# EAGLE board SparkFun RTK Facet - Display SD SIM-Panel (EAGLE 9.6.2), part 1 of 3
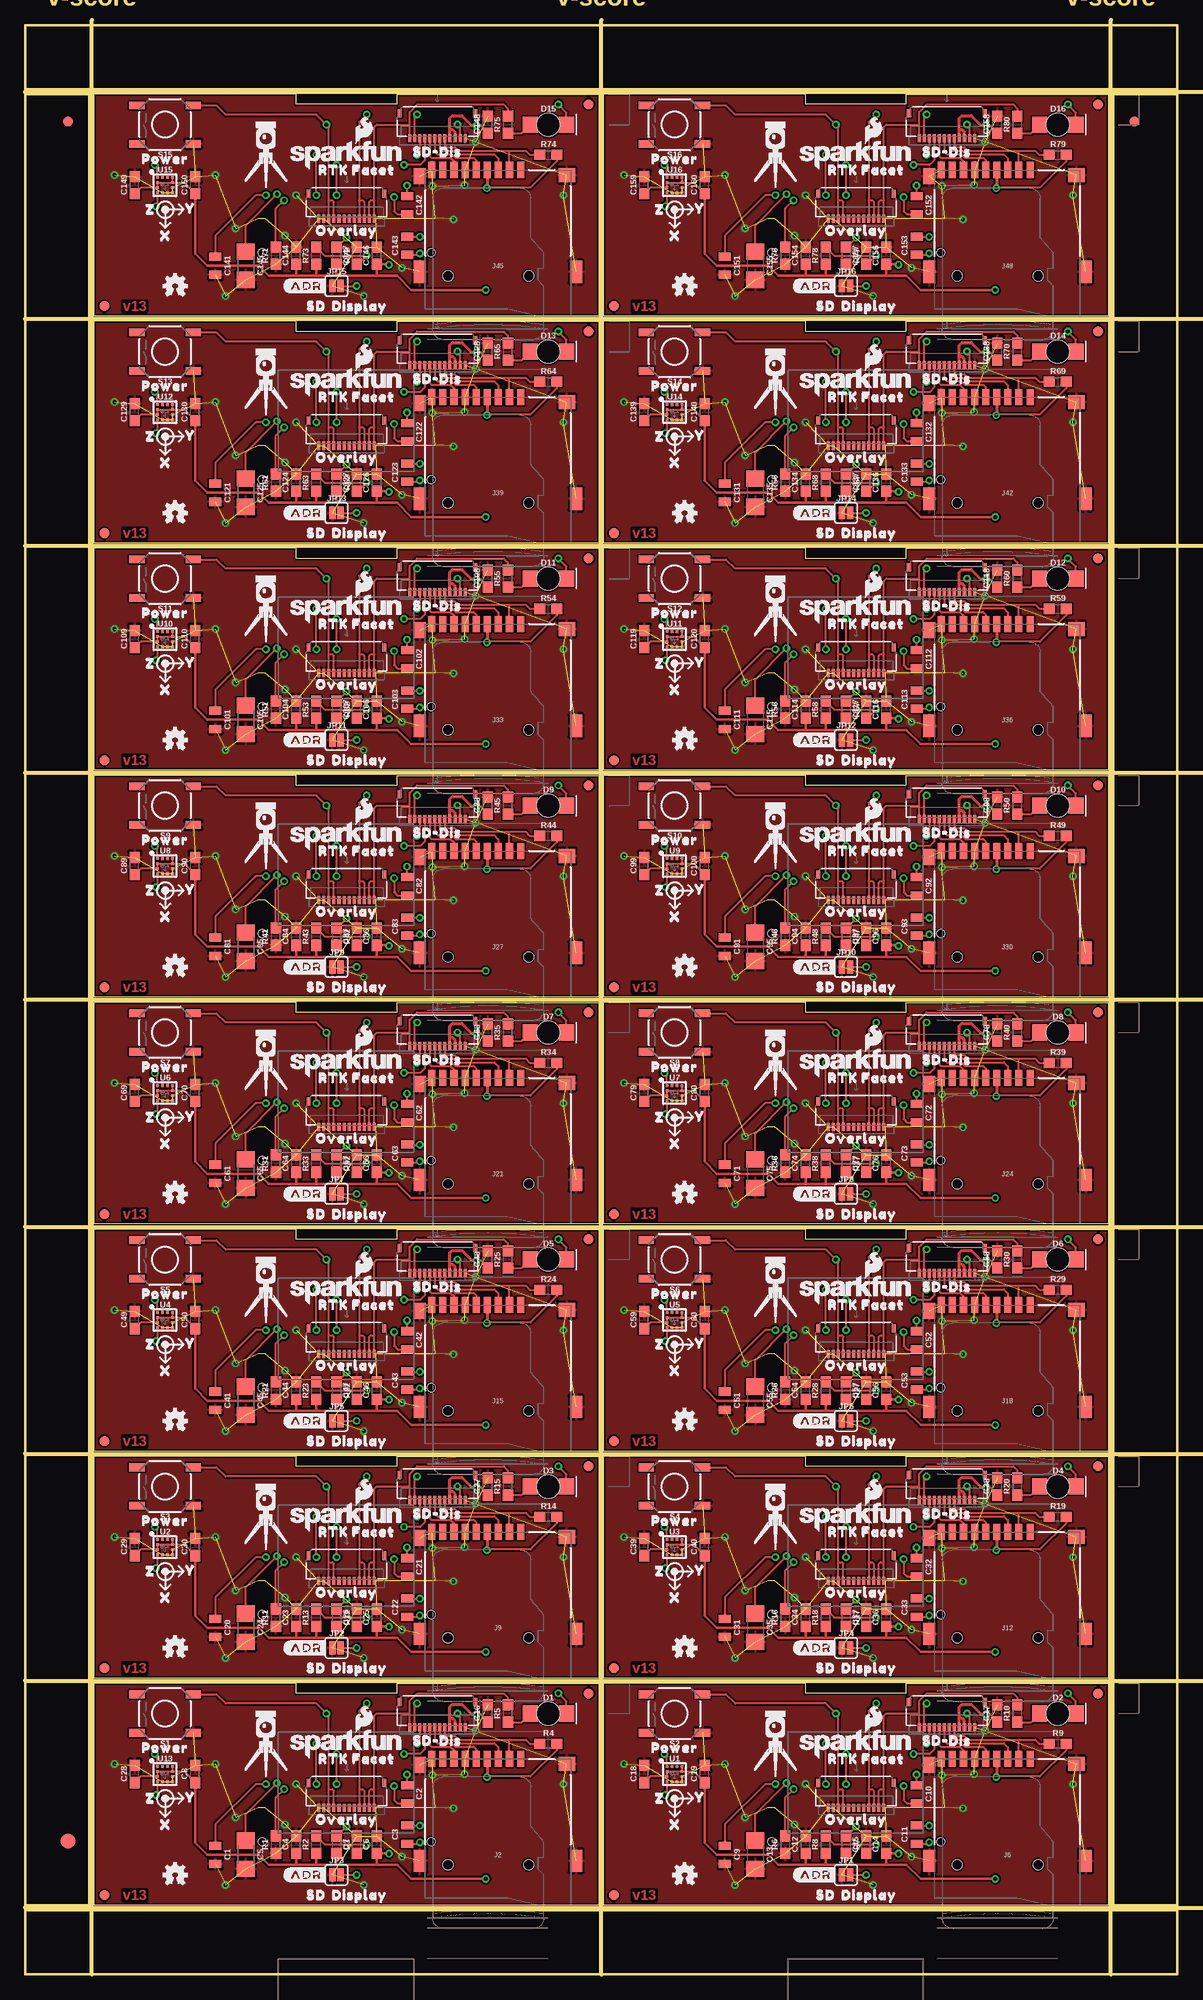
[diagram p0: board, top side]
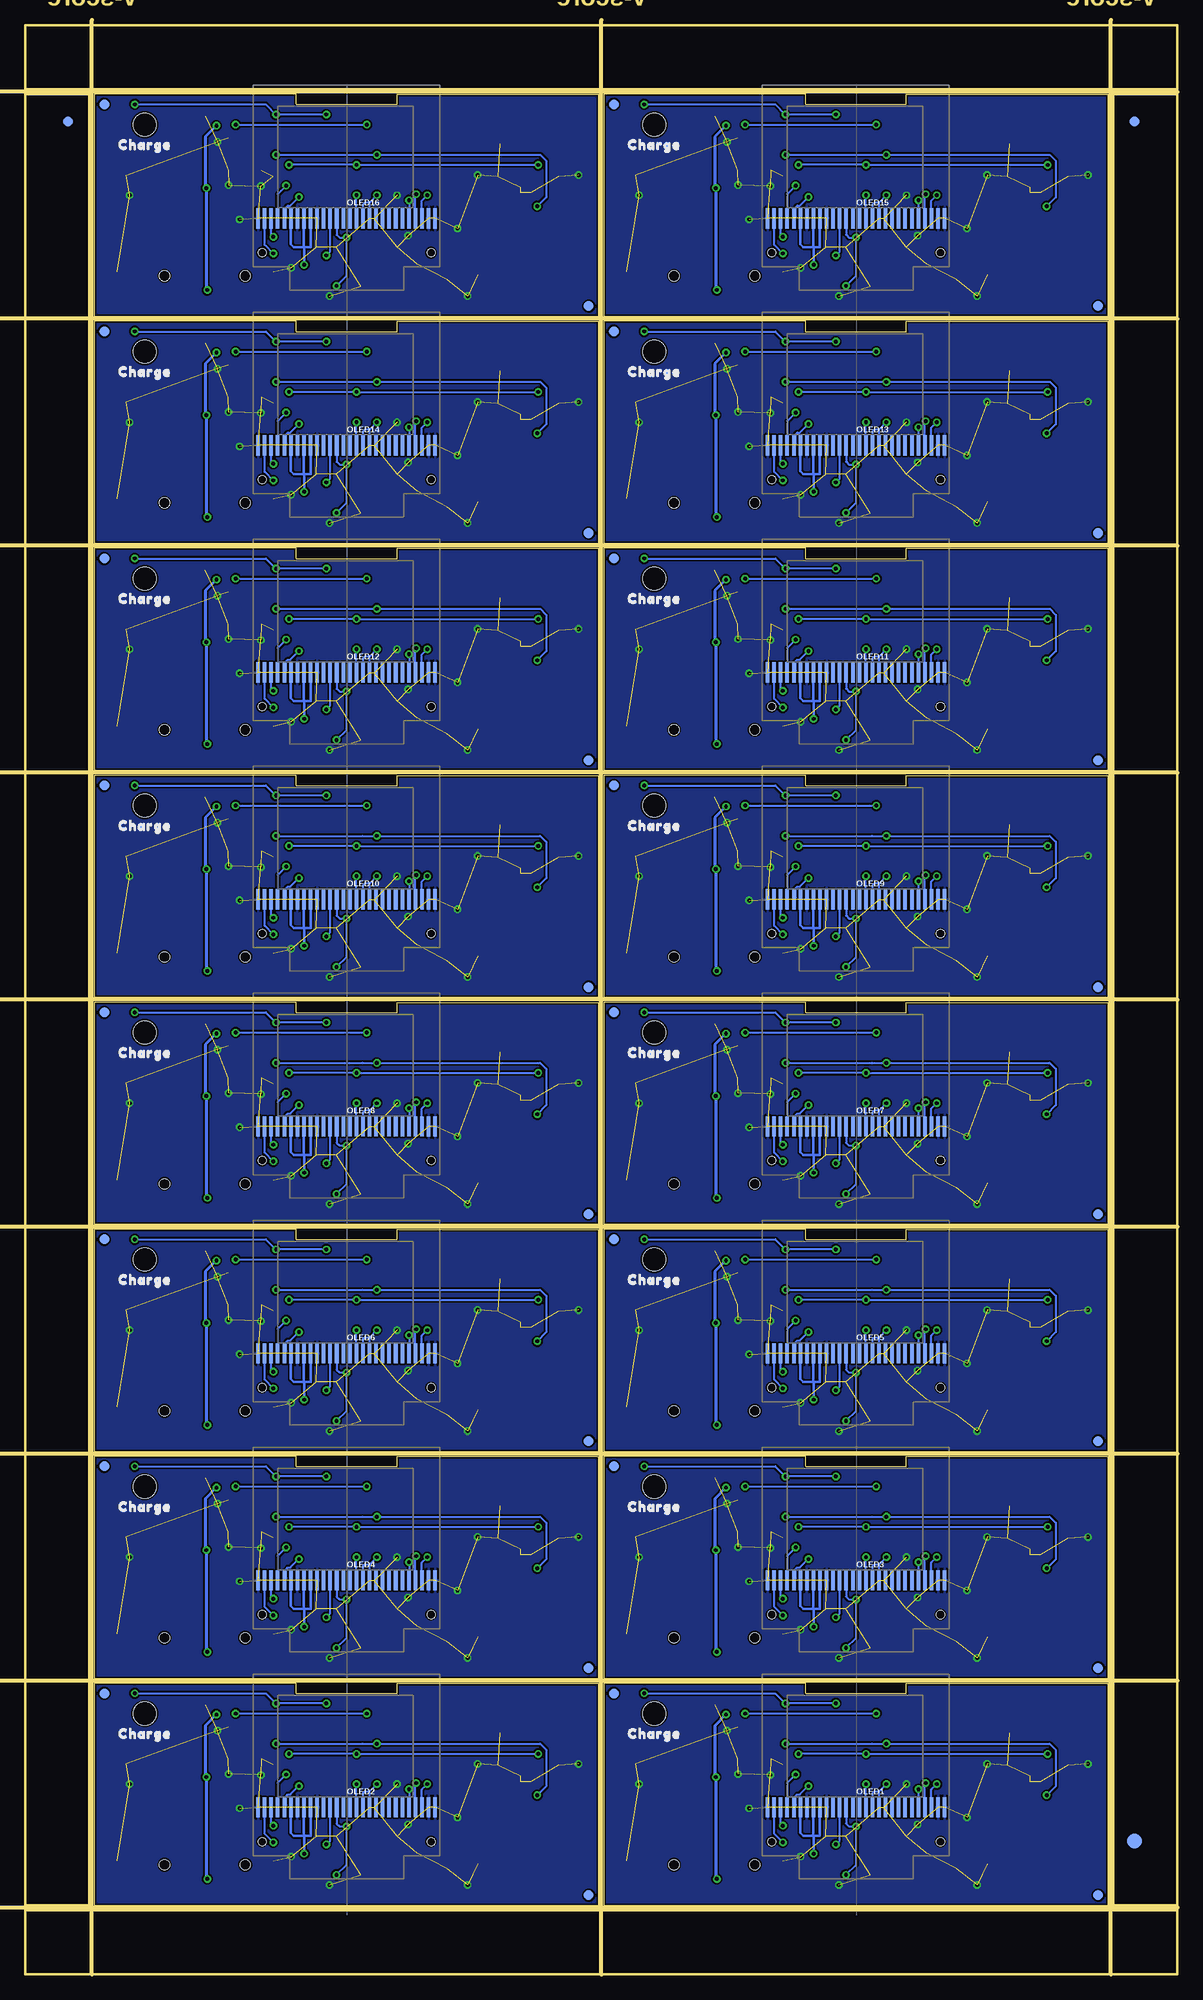
[diagram p1: board, bottom side, seen from below]

Size 114.22 x 193.27 mm. Coordinates in mm from the lower left corner, seen from the top.
Outline: 144 segments
Copper layers (1*16): Top 0.035mm / dielectric 1.5mm / Bottom 0.035mm
Design rules "SparkFun RTK Facet - Display SD SIM": minimum track width 7mil, minimum drill 15mil, track to track 7mil, track to pad 7mil, pad to pad 7mil, via to via 7mil, smd to smd 7mil, copper to edge 7mil, drill to drill 7mil, minimum pad ring 7mil, minimum via ring 7mil, stop-mask expansion 4mil, vias tented up to drill 25mil, thermal gap 10mil
Net classes: 0 default: width 0.127 mm; 1 power: width 0.178 mm
tKeepout: area 54.9,6.9 to 56.9,28.9; area 6.9,6.9 to 8.9,28.9; area 105.4,6.9 to 107.4,28.9; area 57.4,6.9 to 59.4,28.9; area 54.9,29.4 to 56.9,51.4; area 6.9,29.4 to 8.9,51.4; area 105.4,29.4 to 107.4,51.4; area 57.4,29.4 to 59.4,51.4; area 54.9,51.9 to 56.9,73.9; area 6.9,51.9 to 8.9,73.9; area 105.4,51.9 to 107.4,73.9; area 57.4,51.9 to 59.4,73.9; 20 more areas
bKeepout: area 54.9,6.9 to 56.9,28.9; area 6.9,6.9 to 8.9,28.9; area 105.4,6.9 to 107.4,28.9; area 57.4,6.9 to 59.4,28.9; area 54.9,29.4 to 56.9,51.4; area 6.9,29.4 to 8.9,51.4; area 105.4,29.4 to 107.4,51.4; area 57.4,29.4 to 59.4,51.4; area 54.9,51.9 to 56.9,73.9; area 6.9,51.9 to 8.9,73.9; area 105.4,51.9 to 107.4,73.9; area 57.4,51.9 to 59.4,73.9; 20 more areas
tRestrict: area 29.3,16.4 to 29.5,16.7; area 79.8,16.4 to 80,16.7; area 29.3,38.9 to 29.5,39.2; area 79.8,38.9 to 80,39.2; area 29.3,61.4 to 29.5,61.7; area 79.8,61.4 to 80,61.7; area 29.3,83.9 to 29.5,84.2; area 79.8,83.9 to 80,84.2; area 29.3,106.4 to 29.5,106.7; area 79.8,106.4 to 80,106.7; area 29.3,128.9 to 29.5,129.2; area 79.8,128.9 to 80,129.2; 4 more areas
Milling: 12 lines

## Footprints (pad centres in the part's own frame; a part is rotated, then mirrored left to right if it is on the bottom)
0805 = smd 0.8 x 1.2: 1 -0.9,0; 2 0.9,0
0603 = smd 1.1 x 1: 1 -0.85,0; 2 0.85,0
1206 = smd 1.6 x 1.8: 1 -1.4,0; 2 1.4,0
LED-1206-BOTTOM = smd 1.5 x 1.6: A -1.8,0; C 1.8,0 | hole 2.3: 0,0
FIDUCIAL-1X2 = smd 1 x 1: 1 0,0
FIDUCIAL-1.5X3 = smd 1.5 x 1.5: 1 0,0
FPC_12_DOUBLESIDED_BACKFLIP = smd 0.3 x 0.8: 1 -2.75,1.35; 2 -2.25,1.35; 3 -1.75,1.35; 4 -1.25,1.35; 5 -0.75,1.35; 6 -0.25,1.35; 7 0.25,1.35; 8 0.75,1.35; 9 1.25,1.35; 10 1.75,1.35; 11 2.25,1.35; 12 2.75,1.35 | smd 0.4 x 0.8: MP1 -3.75,-1.15; MP2 3.75,-1.15
MICROSD-EXTERNALPIN = smd 0.7 x 1.6: 1 2.25,10.5; 2 1.15,10.5; 3 0.05,10.5; 4 -1.05,10.5; 5 -2.15,10.5; 6 -3.25,10.5; 7 -4.35,10.5; 8 -5.45,10.5; 9 -6.55,10.5 | smd 1.2 x 1.6: 10 -7.75,9.9 | smd 1.2 x 2.2: 11 -7.75,0.4; 12 7.75,0.4 | smd 1.6 x 1.4: 13 6.85,10 | hole 1: 3.05,0; -4.95,0
SMT-JUMPER_2_NO_SILK = smd 0.635 x 1.27: 1 -0.406,0; 2 0.406,0
OLED-0.66-64X48 = smd 0.35 x 2: 1 -8.775,0; 2 -8.125,0; 3 -7.475,0; 4 -6.825,0; 5 -6.175,0; 6 -5.525,0; 7 -4.875,0; 8 -4.225,0; 9 -3.575,0; 10 -2.925,0; 11 -2.275,0; 12 -1.625,0; 13 -0.975,0; 14 -0.325,0; 15 0.325,0; 16 0.975,0; 17 1.625,0; 18 2.275,0; 19 2.925,0; 20 3.575,0; 21 4.225,0; 22 4.875,0; 23 5.525,0; 24 6.175,0; 25 6.825,0; 26 7.475,0; 27 8.125,0; 28 8.775,0 | hole 0.8: 8.375,-3.4; -8.375,-3.4
TACTILE_SWITCH_SMD_5.2MM = smd 1.524 x 0.762: 1 -2.794,1.905; 2 2.794,1.905; 3 -2.794,-1.905; 4 2.794,-1.905
LGA-12-LISDH12 = smd 0.275 x 0.25: 1 -0.75,0.75; 2 -0.75,0.25; 3 -0.75,-0.25; 4 -0.75,-0.75; 7 0.75,-0.75; 8 0.75,-0.25; 9 0.75,0.25; 10 0.75,0.75 | smd 0.25 x 0.275: 5 -0.25,-0.75; 6 0.25,-0.75; 11 0.25,0.75; 12 -0.25,0.75

## Placement (x,y rotation side)
C1  2.2uF  [0805]  18.86,11.86 270 top
C2  1.0uF  [0805]  37.86,17.86 270 top
C3  1.0uF  [0805]  37.86,13.86 90 top
C4  1.0uF  [0603]  26.86,12.86 90 top
C5  4.7uF  [1206]  21.86,11.86 270 top
C6  1.0uF  [0603]  34.86,12.86 90 top
C7  1.0uF  [0603]  32.86,12.86 90 top
C8  10uF  [0603]  16.86,19.86 90 top
C9  2.2uF  [0805]  69.37,11.86 270 top
C10  1.0uF  [0805]  88.37,17.86 270 top
C11  1.0uF  [0805]  88.37,13.86 90 top
C12  1.0uF  [0603]  77.37,12.86 90 top
C13  4.7uF  [1206]  72.37,11.86 270 top
C14  1.0uF  [0603]  85.37,12.86 90 top
C15  1.0uF  [0603]  83.37,12.86 90 top
C16  0.1uF  [0603]  45.86,25.86 90 top
C17  0.1uF  [0603]  96.37,25.86 90 top
C18  0.1uF  [0603]  61.37,19.86 90 top
C19  10uF  [0603]  67.37,19.86 90 top
C20  2.2uF  [0805]  18.86,34.36 270 top
C21  1.0uF  [0805]  37.86,40.36 270 top
C22  1.0uF  [0805]  37.86,36.36 90 top
C23  1.0uF  [0603]  26.86,35.36 90 top
C24  4.7uF  [1206]  21.86,34.36 270 top
C25  1.0uF  [0603]  34.86,35.36 90 top
C26  1.0uF  [0603]  32.86,35.36 90 top
C27  0.1uF  [0603]  45.86,48.36 90 top
C28  0.1uF  [0603]  10.86,19.86 90 top
C29  0.1uF  [0603]  10.86,42.36 90 top
C30  10uF  [0603]  16.86,42.36 90 top
C31  2.2uF  [0805]  69.37,34.36 270 top
C32  1.0uF  [0805]  88.37,40.36 270 top
C33  1.0uF  [0805]  88.37,36.36 90 top
C34  1.0uF  [0603]  77.37,35.36 90 top
C35  4.7uF  [1206]  72.37,34.36 270 top
C36  1.0uF  [0603]  85.37,35.36 90 top
C37  1.0uF  [0603]  83.37,35.36 90 top
C38  0.1uF  [0603]  96.37,48.36 90 top
C39  0.1uF  [0603]  61.37,42.36 90 top
C40  10uF  [0603]  67.37,42.36 90 top
C41  2.2uF  [0805]  18.86,56.87 270 top
C42  1.0uF  [0805]  37.86,62.87 270 top
C43  1.0uF  [0805]  37.86,58.87 90 top
C44  1.0uF  [0603]  26.86,57.87 90 top
C45  4.7uF  [1206]  21.86,56.87 270 top
C46  1.0uF  [0603]  34.86,57.87 90 top
C47  1.0uF  [0603]  32.86,57.87 90 top
C48  0.1uF  [0603]  45.86,70.87 90 top
C49  0.1uF  [0603]  10.86,64.87 90 top
C50  10uF  [0603]  16.86,64.87 90 top
C51  2.2uF  [0805]  69.37,56.87 270 top
C52  1.0uF  [0805]  88.37,62.87 270 top
C53  1.0uF  [0805]  88.37,58.87 90 top
C54  1.0uF  [0603]  77.37,57.87 90 top
C55  4.7uF  [1206]  72.37,56.87 270 top
C56  1.0uF  [0603]  85.37,57.87 90 top
C57  1.0uF  [0603]  83.37,57.87 90 top
C58  0.1uF  [0603]  96.37,70.87 90 top
C59  0.1uF  [0603]  61.37,64.87 90 top
C60  10uF  [0603]  67.37,64.87 90 top
C61  2.2uF  [0805]  18.86,79.38 270 top
C62  1.0uF  [0805]  37.86,85.38 270 top
C63  1.0uF  [0805]  37.86,81.38 90 top
C64  1.0uF  [0603]  26.86,80.38 90 top
C65  4.7uF  [1206]  21.86,79.38 270 top
C66  1.0uF  [0603]  34.86,80.38 90 top
C67  1.0uF  [0603]  32.86,80.38 90 top
C68  0.1uF  [0603]  45.86,93.38 90 top
C69  0.1uF  [0603]  10.86,87.38 90 top
C70  10uF  [0603]  16.86,87.38 90 top
C71  2.2uF  [0805]  69.37,79.38 270 top
C72  1.0uF  [0805]  88.37,85.38 270 top
C73  1.0uF  [0805]  88.37,81.38 90 top
C74  1.0uF  [0603]  77.37,80.38 90 top
C75  4.7uF  [1206]  72.37,79.38 270 top
C76  1.0uF  [0603]  85.37,80.38 90 top
C77  1.0uF  [0603]  83.37,80.38 90 top
C78  0.1uF  [0603]  96.37,93.38 90 top
C79  0.1uF  [0603]  61.37,87.38 90 top
C80  10uF  [0603]  67.37,87.38 90 top
C81  2.2uF  [0805]  18.86,101.89 270 top
C82  1.0uF  [0805]  37.86,107.89 270 top
C83  1.0uF  [0805]  37.86,103.89 90 top
C84  1.0uF  [0603]  26.86,102.89 90 top
C85  4.7uF  [1206]  21.86,101.89 270 top
C86  1.0uF  [0603]  34.86,102.89 90 top
C87  1.0uF  [0603]  32.86,102.89 90 top
C88  0.1uF  [0603]  45.86,115.89 90 top
C89  0.1uF  [0603]  10.86,109.89 90 top
C90  10uF  [0603]  16.86,109.89 90 top
C91  2.2uF  [0805]  69.37,101.89 270 top
C92  1.0uF  [0805]  88.37,107.89 270 top
C93  1.0uF  [0805]  88.37,103.89 90 top
C94  1.0uF  [0603]  77.37,102.89 90 top
C95  4.7uF  [1206]  72.37,101.89 270 top
C96  1.0uF  [0603]  85.37,102.89 90 top
C97  1.0uF  [0603]  83.37,102.89 90 top
C98  0.1uF  [0603]  96.37,115.89 90 top
C99  0.1uF  [0603]  61.37,109.89 90 top
C100  10uF  [0603]  67.37,109.89 90 top
C101  2.2uF  [0805]  18.86,124.4 270 top
C102  1.0uF  [0805]  37.86,130.4 270 top
C103  1.0uF  [0805]  37.86,126.4 90 top
C104  1.0uF  [0603]  26.86,125.4 90 top
C105  4.7uF  [1206]  21.86,124.4 270 top
C106  1.0uF  [0603]  34.86,125.4 90 top
C107  1.0uF  [0603]  32.86,125.4 90 top
C108  0.1uF  [0603]  45.86,138.4 90 top
C109  0.1uF  [0603]  10.86,132.4 90 top
C110  10uF  [0603]  16.86,132.4 90 top
C111  2.2uF  [0805]  69.37,124.4 270 top
C112  1.0uF  [0805]  88.37,130.4 270 top
C113  1.0uF  [0805]  88.37,126.4 90 top
C114  1.0uF  [0603]  77.37,125.4 90 top
C115  4.7uF  [1206]  72.37,124.4 270 top
C116  1.0uF  [0603]  85.37,125.4 90 top
C117  1.0uF  [0603]  83.37,125.4 90 top
C118  0.1uF  [0603]  96.37,138.4 90 top
C119  0.1uF  [0603]  61.37,132.4 90 top
C120  10uF  [0603]  67.37,132.4 90 top
C121  2.2uF  [0805]  18.86,146.91 270 top
C122  1.0uF  [0805]  37.86,152.91 270 top
C123  1.0uF  [0805]  37.86,148.91 90 top
C124  1.0uF  [0603]  26.86,147.91 90 top
C125  4.7uF  [1206]  21.86,146.91 270 top
C126  1.0uF  [0603]  34.86,147.91 90 top
C127  1.0uF  [0603]  32.86,147.91 90 top
C128  0.1uF  [0603]  45.86,160.91 90 top
C129  0.1uF  [0603]  10.86,154.91 90 top
C130  10uF  [0603]  16.86,154.91 90 top
C131  2.2uF  [0805]  69.37,146.91 270 top
C132  1.0uF  [0805]  88.37,152.91 270 top
C133  1.0uF  [0805]  88.37,148.91 90 top
C134  1.0uF  [0603]  77.37,147.91 90 top
C135  4.7uF  [1206]  72.37,146.91 270 top
C136  1.0uF  [0603]  85.37,147.91 90 top
C137  1.0uF  [0603]  83.37,147.91 90 top
C138  0.1uF  [0603]  96.37,160.91 90 top
C139  0.1uF  [0603]  61.37,154.91 90 top
C140  10uF  [0603]  67.37,154.91 90 top
C141  2.2uF  [0805]  18.86,169.41 270 top
C142  1.0uF  [0805]  37.86,175.41 270 top
C143  1.0uF  [0805]  37.86,171.41 90 top
C144  1.0uF  [0603]  26.86,170.41 90 top
C145  4.7uF  [1206]  21.86,169.41 270 top
C146  1.0uF  [0603]  34.86,170.41 90 top
C147  1.0uF  [0603]  32.86,170.41 90 top
C148  0.1uF  [0603]  45.86,183.41 90 top
C149  0.1uF  [0603]  10.86,177.41 90 top
C150  10uF  [0603]  16.86,177.41 90 top
C151  2.2uF  [0805]  69.37,169.41 270 top
C152  1.0uF  [0805]  88.37,175.41 270 top
C153  1.0uF  [0805]  88.37,171.41 90 top
C154  1.0uF  [0603]  77.37,170.41 90 top
C155  4.7uF  [1206]  72.37,169.41 270 top
C156  1.0uF  [0603]  85.37,170.41 90 top
C157  1.0uF  [0603]  83.37,170.41 90 top
C158  0.1uF  [0603]  96.37,183.41 90 top
C159  0.1uF  [0603]  61.37,177.41 90 top
C160  10uF  [0603]  67.37,177.41 90 top
D1  Green  [LED-1206-BOTTOM]  51.86,25.86 0 top
D2  Green  [LED-1206-BOTTOM]  102.37,25.86 0 top
D3  Green  [LED-1206-BOTTOM]  51.86,48.36 0 top
D4  Green  [LED-1206-BOTTOM]  102.37,48.36 0 top
D5  Green  [LED-1206-BOTTOM]  51.86,70.87 0 top
D6  Green  [LED-1206-BOTTOM]  102.37,70.87 0 top
D7  Green  [LED-1206-BOTTOM]  51.86,93.38 0 top
D8  Green  [LED-1206-BOTTOM]  102.37,93.38 0 top
D9  Green  [LED-1206-BOTTOM]  51.86,115.89 0 top
D10  Green  [LED-1206-BOTTOM]  102.37,115.89 0 top
D11  Green  [LED-1206-BOTTOM]  51.86,138.4 0 top
D12  Green  [LED-1206-BOTTOM]  102.37,138.4 0 top
D13  Green  [LED-1206-BOTTOM]  51.86,160.91 0 top
D14  Green  [LED-1206-BOTTOM]  102.37,160.91 0 top
D15  Green  [LED-1206-BOTTOM]  51.86,183.41 0 top
D16  Green  [LED-1206-BOTTOM]  102.37,183.41 0 top
E$1  [FIDUCIAL-1X2]  4.23,183.75 0 top
E$2  [FIDUCIAL-1X2]  4.23,183.75 0 bottom
E$3  [FIDUCIAL-1X2]  109.99,183.75 0 top
E$4  [FIDUCIAL-1X2]  109.99,183.75 0 bottom
E$5  [FIDUCIAL-1.5X3]  4.23,13.21 0 top
E$6  [FIDUCIAL-1.5X3]  4.23,13.21 0 bottom
FID1  FIDUCIAL1X2  [FIDUCIAL-1X2]  7.86,7.86 0 bottom
FID2  FIDUCIAL1X2  [FIDUCIAL-1X2]  55.86,27.86 0 bottom
FID3  FIDUCIAL1X2  [FIDUCIAL-1X2]  55.86,27.86 0 top
FID4  FIDUCIAL1X2  [FIDUCIAL-1X2]  7.86,7.86 0 top
FID5  FIDUCIAL1X2  [FIDUCIAL-1X2]  58.37,7.86 0 bottom
FID6  FIDUCIAL1X2  [FIDUCIAL-1X2]  106.37,27.86 0 bottom
FID7  FIDUCIAL1X2  [FIDUCIAL-1X2]  106.37,27.86 0 top
FID8  FIDUCIAL1X2  [FIDUCIAL-1X2]  58.37,7.86 0 top
FID9  FIDUCIAL1X2  [FIDUCIAL-1X2]  7.86,30.36 0 bottom
FID10  FIDUCIAL1X2  [FIDUCIAL-1X2]  55.86,50.36 0 bottom
FID11  FIDUCIAL1X2  [FIDUCIAL-1X2]  55.86,50.36 0 top
FID12  FIDUCIAL1X2  [FIDUCIAL-1X2]  7.86,30.36 0 top
FID13  FIDUCIAL1X2  [FIDUCIAL-1X2]  58.37,30.36 0 bottom
FID14  FIDUCIAL1X2  [FIDUCIAL-1X2]  106.37,50.36 0 bottom
FID15  FIDUCIAL1X2  [FIDUCIAL-1X2]  106.37,50.36 0 top
FID16  FIDUCIAL1X2  [FIDUCIAL-1X2]  58.37,30.36 0 top
FID17  FIDUCIAL1X2  [FIDUCIAL-1X2]  7.86,52.87 0 bottom
FID18  FIDUCIAL1X2  [FIDUCIAL-1X2]  55.86,72.87 0 bottom
FID19  FIDUCIAL1X2  [FIDUCIAL-1X2]  55.86,72.87 0 top
FID20  FIDUCIAL1X2  [FIDUCIAL-1X2]  7.86,52.87 0 top
FID21  FIDUCIAL1X2  [FIDUCIAL-1X2]  58.37,52.87 0 bottom
FID22  FIDUCIAL1X2  [FIDUCIAL-1X2]  106.37,72.87 0 bottom
FID23  FIDUCIAL1X2  [FIDUCIAL-1X2]  106.37,72.87 0 top
FID24  FIDUCIAL1X2  [FIDUCIAL-1X2]  58.37,52.87 0 top
FID25  FIDUCIAL1X2  [FIDUCIAL-1X2]  7.86,75.38 0 bottom
FID26  FIDUCIAL1X2  [FIDUCIAL-1X2]  55.86,95.38 0 bottom
FID27  FIDUCIAL1X2  [FIDUCIAL-1X2]  55.86,95.38 0 top
FID28  FIDUCIAL1X2  [FIDUCIAL-1X2]  7.86,75.38 0 top
FID29  FIDUCIAL1X2  [FIDUCIAL-1X2]  58.37,75.38 0 bottom
FID30  FIDUCIAL1X2  [FIDUCIAL-1X2]  106.37,95.38 0 bottom
FID31  FIDUCIAL1X2  [FIDUCIAL-1X2]  106.37,95.38 0 top
FID32  FIDUCIAL1X2  [FIDUCIAL-1X2]  58.37,75.38 0 top
FID33  FIDUCIAL1X2  [FIDUCIAL-1X2]  7.86,97.89 0 bottom
FID34  FIDUCIAL1X2  [FIDUCIAL-1X2]  55.86,117.89 0 bottom
FID35  FIDUCIAL1X2  [FIDUCIAL-1X2]  55.86,117.89 0 top
FID36  FIDUCIAL1X2  [FIDUCIAL-1X2]  7.86,97.89 0 top
FID37  FIDUCIAL1X2  [FIDUCIAL-1X2]  58.37,97.89 0 bottom
FID38  FIDUCIAL1X2  [FIDUCIAL-1X2]  106.37,117.89 0 bottom
FID39  FIDUCIAL1X2  [FIDUCIAL-1X2]  106.37,117.89 0 top
FID40  FIDUCIAL1X2  [FIDUCIAL-1X2]  58.37,97.89 0 top
FID41  FIDUCIAL1X2  [FIDUCIAL-1X2]  7.86,120.4 0 bottom
FID42  FIDUCIAL1X2  [FIDUCIAL-1X2]  55.86,140.4 0 bottom
FID43  FIDUCIAL1X2  [FIDUCIAL-1X2]  55.86,140.4 0 top
FID44  FIDUCIAL1X2  [FIDUCIAL-1X2]  7.86,120.4 0 top
FID45  FIDUCIAL1X2  [FIDUCIAL-1X2]  58.37,120.4 0 bottom
FID46  FIDUCIAL1X2  [FIDUCIAL-1X2]  106.37,140.4 0 bottom
FID47  FIDUCIAL1X2  [FIDUCIAL-1X2]  106.37,140.4 0 top
FID48  FIDUCIAL1X2  [FIDUCIAL-1X2]  58.37,120.4 0 top
FID49  FIDUCIAL1X2  [FIDUCIAL-1X2]  7.86,142.91 0 bottom
FID50  FIDUCIAL1X2  [FIDUCIAL-1X2]  55.86,162.91 0 bottom
FID51  FIDUCIAL1X2  [FIDUCIAL-1X2]  55.86,162.91 0 top
FID52  FIDUCIAL1X2  [FIDUCIAL-1X2]  7.86,142.91 0 top
FID53  FIDUCIAL1X2  [FIDUCIAL-1X2]  58.37,142.91 0 bottom
FID54  FIDUCIAL1X2  [FIDUCIAL-1X2]  106.37,162.91 0 bottom
FID55  FIDUCIAL1X2  [FIDUCIAL-1X2]  106.37,162.91 0 top
FID56  FIDUCIAL1X2  [FIDUCIAL-1X2]  58.37,142.91 0 top
FID57  FIDUCIAL1X2  [FIDUCIAL-1X2]  7.86,165.41 0 bottom
FID58  FIDUCIAL1X2  [FIDUCIAL-1X2]  55.86,185.41 0 bottom
FID59  FIDUCIAL1X2  [FIDUCIAL-1X2]  55.86,185.41 0 top
FID60  FIDUCIAL1X2  [FIDUCIAL-1X2]  7.86,165.41 0 top
FID61  FIDUCIAL1X2  [FIDUCIAL-1X2]  58.37,165.41 0 bottom
FID62  FIDUCIAL1X2  [FIDUCIAL-1X2]  106.37,185.41 0 bottom
FID63  FIDUCIAL1X2  [FIDUCIAL-1X2]  106.37,185.41 0 top
FID64  FIDUCIAL1X2  [FIDUCIAL-1X2]  58.37,165.41 0 top
J1  FPC_12_0.5MM_BACKFLIP  [FPC_12_DOUBLESIDED_BACKFLIP]  40.86,25.86 180 top
J2  MICRO-SD-PUSH-PUSH-EXT-PIN  [MICROSD-EXTERNALPIN]  46.86,10.86 0 top
J3  FPC_12_0.5MM_BACKFLIP  [FPC_12_DOUBLESIDED_BACKFLIP]  31.86,17.86 180 top
J4  FPC_12_0.5MM_BACKFLIP  [FPC_12_DOUBLESIDED_BACKFLIP]  91.37,25.86 180 top
J5  FPC_12_0.5MM_BACKFLIP  [FPC_12_DOUBLESIDED_BACKFLIP]  82.37,17.86 180 top
J6  MICRO-SD-PUSH-PUSH-EXT-PIN  [MICROSD-EXTERNALPIN]  97.37,10.86 0 top
J7  FPC_12_0.5MM_BACKFLIP  [FPC_12_DOUBLESIDED_BACKFLIP]  40.86,48.36 180 top
J8  FPC_12_0.5MM_BACKFLIP  [FPC_12_DOUBLESIDED_BACKFLIP]  31.86,40.36 180 top
J9  MICRO-SD-PUSH-PUSH-EXT-PIN  [MICROSD-EXTERNALPIN]  46.86,33.36 0 top
J10  FPC_12_0.5MM_BACKFLIP  [FPC_12_DOUBLESIDED_BACKFLIP]  91.37,48.36 180 top
J11  FPC_12_0.5MM_BACKFLIP  [FPC_12_DOUBLESIDED_BACKFLIP]  82.37,40.36 180 top
J12  MICRO-SD-PUSH-PUSH-EXT-PIN  [MICROSD-EXTERNALPIN]  97.37,33.36 0 top
J13  FPC_12_0.5MM_BACKFLIP  [FPC_12_DOUBLESIDED_BACKFLIP]  40.86,70.87 180 top
J14  FPC_12_0.5MM_BACKFLIP  [FPC_12_DOUBLESIDED_BACKFLIP]  31.86,62.87 180 top
J15  MICRO-SD-PUSH-PUSH-EXT-PIN  [MICROSD-EXTERNALPIN]  46.86,55.87 0 top
J16  FPC_12_0.5MM_BACKFLIP  [FPC_12_DOUBLESIDED_BACKFLIP]  91.37,70.87 180 top
J17  FPC_12_0.5MM_BACKFLIP  [FPC_12_DOUBLESIDED_BACKFLIP]  82.37,62.87 180 top
J18  MICRO-SD-PUSH-PUSH-EXT-PIN  [MICROSD-EXTERNALPIN]  97.37,55.87 0 top
J19  FPC_12_0.5MM_BACKFLIP  [FPC_12_DOUBLESIDED_BACKFLIP]  40.86,93.38 180 top
J20  FPC_12_0.5MM_BACKFLIP  [FPC_12_DOUBLESIDED_BACKFLIP]  31.86,85.38 180 top
J21  MICRO-SD-PUSH-PUSH-EXT-PIN  [MICROSD-EXTERNALPIN]  46.86,78.38 0 top
J22  FPC_12_0.5MM_BACKFLIP  [FPC_12_DOUBLESIDED_BACKFLIP]  91.37,93.38 180 top
J23  FPC_12_0.5MM_BACKFLIP  [FPC_12_DOUBLESIDED_BACKFLIP]  82.37,85.38 180 top
J24  MICRO-SD-PUSH-PUSH-EXT-PIN  [MICROSD-EXTERNALPIN]  97.37,78.38 0 top
J25  FPC_12_0.5MM_BACKFLIP  [FPC_12_DOUBLESIDED_BACKFLIP]  40.86,115.89 180 top
J26  FPC_12_0.5MM_BACKFLIP  [FPC_12_DOUBLESIDED_BACKFLIP]  31.86,107.89 180 top
J27  MICRO-SD-PUSH-PUSH-EXT-PIN  [MICROSD-EXTERNALPIN]  46.86,100.89 0 top
J28  FPC_12_0.5MM_BACKFLIP  [FPC_12_DOUBLESIDED_BACKFLIP]  91.37,115.89 180 top
J29  FPC_12_0.5MM_BACKFLIP  [FPC_12_DOUBLESIDED_BACKFLIP]  82.37,107.89 180 top
J30  MICRO-SD-PUSH-PUSH-EXT-PIN  [MICROSD-EXTERNALPIN]  97.37,100.89 0 top
J31  FPC_12_0.5MM_BACKFLIP  [FPC_12_DOUBLESIDED_BACKFLIP]  40.86,138.4 180 top
J32  FPC_12_0.5MM_BACKFLIP  [FPC_12_DOUBLESIDED_BACKFLIP]  31.86,130.4 180 top
J33  MICRO-SD-PUSH-PUSH-EXT-PIN  [MICROSD-EXTERNALPIN]  46.86,123.4 0 top
J34  FPC_12_0.5MM_BACKFLIP  [FPC_12_DOUBLESIDED_BACKFLIP]  91.37,138.4 180 top
J35  FPC_12_0.5MM_BACKFLIP  [FPC_12_DOUBLESIDED_BACKFLIP]  82.37,130.4 180 top
J36  MICRO-SD-PUSH-PUSH-EXT-PIN  [MICROSD-EXTERNALPIN]  97.37,123.4 0 top
J37  FPC_12_0.5MM_BACKFLIP  [FPC_12_DOUBLESIDED_BACKFLIP]  40.86,160.91 180 top
J38  FPC_12_0.5MM_BACKFLIP  [FPC_12_DOUBLESIDED_BACKFLIP]  31.86,152.91 180 top
J39  MICRO-SD-PUSH-PUSH-EXT-PIN  [MICROSD-EXTERNALPIN]  46.86,145.91 0 top
J40  FPC_12_0.5MM_BACKFLIP  [FPC_12_DOUBLESIDED_BACKFLIP]  91.37,160.91 180 top
J41  FPC_12_0.5MM_BACKFLIP  [FPC_12_DOUBLESIDED_BACKFLIP]  82.37,152.91 180 top
J42  MICRO-SD-PUSH-PUSH-EXT-PIN  [MICROSD-EXTERNALPIN]  97.37,145.91 0 top
J43  FPC_12_0.5MM_BACKFLIP  [FPC_12_DOUBLESIDED_BACKFLIP]  40.86,183.41 180 top
J44  FPC_12_0.5MM_BACKFLIP  [FPC_12_DOUBLESIDED_BACKFLIP]  31.86,175.41 180 top
J45  MICRO-SD-PUSH-PUSH-EXT-PIN  [MICROSD-EXTERNALPIN]  46.86,168.41 0 top
J46  FPC_12_0.5MM_BACKFLIP  [FPC_12_DOUBLESIDED_BACKFLIP]  91.37,183.41 180 top
J47  FPC_12_0.5MM_BACKFLIP  [FPC_12_DOUBLESIDED_BACKFLIP]  82.37,175.41 180 top
J48  MICRO-SD-PUSH-PUSH-EXT-PIN  [MICROSD-EXTERNALPIN]  97.37,168.41 0 top
JP1  [SMT-JUMPER_2_NO_SILK]  81.37,9.86 0 top
JP2  [SMT-JUMPER_2_NO_SILK]  30.86,32.36 0 top
JP3  [SMT-JUMPER_2_NO_SILK]  30.86,9.86 0 top
JP4  [SMT-JUMPER_2_NO_SILK]  81.37,32.36 0 top
JP5  [SMT-JUMPER_2_NO_SILK]  30.86,54.87 0 top
JP6  [SMT-JUMPER_2_NO_SILK]  81.37,54.87 0 top
JP7  [SMT-JUMPER_2_NO_SILK]  30.86,77.38 0 top
JP8  [SMT-JUMPER_2_NO_SILK]  81.37,77.38 0 top
JP9  [SMT-JUMPER_2_NO_SILK]  30.86,99.89 0 top
JP10  [SMT-JUMPER_2_NO_SILK]  81.37,99.89 0 top
JP11  [SMT-JUMPER_2_NO_SILK]  30.86,122.4 0 top
JP12  [SMT-JUMPER_2_NO_SILK]  81.37,122.4 0 top
JP13  [SMT-JUMPER_2_NO_SILK]  30.86,144.91 0 top
JP14  [SMT-JUMPER_2_NO_SILK]  81.37,144.91 0 top
JP15  [SMT-JUMPER_2_NO_SILK]  30.86,167.41 0 top
JP16  [SMT-JUMPER_2_NO_SILK]  81.37,167.41 0 top
LOGO1  OSHW-LOGOMINI  [OSHW-LOGO-MINI]  65.37,9.86 0 top
LOGO2  SFE_LOGO_NAME_FLAME.1_INCH  [SFE_LOGO_NAME_FLAME_.1]  82.37,22.86 0 top
LOGO3  OSHW-LOGOMINI  [OSHW-LOGO-MINI]  14.86,9.86 0 top
LOGO4  OSHW-LOGOMINI  [OSHW-LOGO-MINI]  14.86,32.36 0 top
LOGO5  SFE_LOGO_NAME_FLAME.1_INCH  [SFE_LOGO_NAME_FLAME_.1]  31.86,22.86 0 top
LOGO6  SFE_LOGO_NAME_FLAME.1_INCH  [SFE_LOGO_NAME_FLAME_.1]  31.86,45.36 0 top
LOGO7  OSHW-LOGOMINI  [OSHW-LOGO-MINI]  65.37,32.36 0 top
LOGO8  SFE_LOGO_NAME_FLAME.1_INCH  [SFE_LOGO_NAME_FLAME_.1]  82.37,45.36 0 top
LOGO9  OSHW-LOGOMINI  [OSHW-LOGO-MINI]  14.86,54.87 0 top
LOGO10  SFE_LOGO_NAME_FLAME.1_INCH  [SFE_LOGO_NAME_FLAME_.1]  31.86,67.87 0 top
LOGO11  OSHW-LOGOMINI  [OSHW-LOGO-MINI]  65.37,54.87 0 top
LOGO12  SFE_LOGO_NAME_FLAME.1_INCH  [SFE_LOGO_NAME_FLAME_.1]  82.37,67.87 0 top
LOGO13  OSHW-LOGOMINI  [OSHW-LOGO-MINI]  14.86,77.38 0 top
LOGO14  SFE_LOGO_NAME_FLAME.1_INCH  [SFE_LOGO_NAME_FLAME_.1]  31.86,90.38 0 top
LOGO15  OSHW-LOGOMINI  [OSHW-LOGO-MINI]  65.37,77.38 0 top
LOGO16  SFE_LOGO_NAME_FLAME.1_INCH  [SFE_LOGO_NAME_FLAME_.1]  82.37,90.38 0 top
LOGO17  OSHW-LOGOMINI  [OSHW-LOGO-MINI]  14.86,99.89 0 top
LOGO18  SFE_LOGO_NAME_FLAME.1_INCH  [SFE_LOGO_NAME_FLAME_.1]  31.86,112.89 0 top
LOGO19  OSHW-LOGOMINI  [OSHW-LOGO-MINI]  65.37,99.89 0 top
LOGO20  SFE_LOGO_NAME_FLAME.1_INCH  [SFE_LOGO_NAME_FLAME_.1]  82.37,112.89 0 top
LOGO21  OSHW-LOGOMINI  [OSHW-LOGO-MINI]  14.86,122.4 0 top
LOGO22  SFE_LOGO_NAME_FLAME.1_INCH  [SFE_LOGO_NAME_FLAME_.1]  31.86,135.4 0 top
LOGO23  OSHW-LOGOMINI  [OSHW-LOGO-MINI]  65.37,122.4 0 top
LOGO24  SFE_LOGO_NAME_FLAME.1_INCH  [SFE_LOGO_NAME_FLAME_.1]  82.37,135.4 0 top
LOGO25  OSHW-LOGOMINI  [OSHW-LOGO-MINI]  14.86,144.91 0 top
LOGO26  SFE_LOGO_NAME_FLAME.1_INCH  [SFE_LOGO_NAME_FLAME_.1]  31.86,157.91 0 top
LOGO27  OSHW-LOGOMINI  [OSHW-LOGO-MINI]  65.37,144.91 0 top
LOGO28  SFE_LOGO_NAME_FLAME.1_INCH  [SFE_LOGO_NAME_FLAME_.1]  82.37,157.91 0 top
LOGO29  OSHW-LOGOMINI  [OSHW-LOGO-MINI]  14.86,167.41 0 top
LOGO30  SFE_LOGO_NAME_FLAME.1_INCH  [SFE_LOGO_NAME_FLAME_.1]  31.86,180.41 0 top
LOGO31  OSHW-LOGOMINI  [OSHW-LOGO-MINI]  65.37,167.41 0 top
LOGO32  SFE_LOGO_NAME_FLAME.1_INCH  [SFE_LOGO_NAME_FLAME_.1]  82.37,180.41 0 top
OLED1  OLED0.66  [OLED-0.66-64X48]  31.86,16.56 0 bottom
OLED2  OLED0.66  [OLED-0.66-64X48]  82.37,16.56 0 bottom
OLED3  OLED0.66  [OLED-0.66-64X48]  31.86,39.06 0 bottom
OLED4  OLED0.66  [OLED-0.66-64X48]  82.37,39.06 0 bottom
OLED5  OLED0.66  [OLED-0.66-64X48]  31.86,61.57 0 bottom
OLED6  OLED0.66  [OLED-0.66-64X48]  82.37,61.57 0 bottom
OLED7  OLED0.66  [OLED-0.66-64X48]  31.86,84.08 0 bottom
OLED8  OLED0.66  [OLED-0.66-64X48]  82.37,84.08 0 bottom
OLED9  OLED0.66  [OLED-0.66-64X48]  31.86,106.59 0 bottom
OLED10  OLED0.66  [OLED-0.66-64X48]  82.37,106.59 0 bottom
OLED11  OLED0.66  [OLED-0.66-64X48]  31.86,129.1 0 bottom
OLED12  OLED0.66  [OLED-0.66-64X48]  82.37,129.1 0 bottom
OLED13  OLED0.66  [OLED-0.66-64X48]  31.86,151.61 0 bottom
OLED14  OLED0.66  [OLED-0.66-64X48]  82.37,151.61 0 bottom
OLED15  OLED0.66  [OLED-0.66-64X48]  31.86,174.11 0 bottom
OLED16  OLED0.66  [OLED-0.66-64X48]  82.37,174.11 0 bottom
R1  390k  [0603]  24.86,12.86 90 top
R2  10k  [0603]  28.86,12.86 90 top
R3  10k  [0603]  30.86,12.86 270 top
R4  100k  [0603]  51.86,22.86 0 top
R5  1k  [0603]  47.86,25.86 90 top
R6  390k  [0603]  75.37,12.86 90 top
R7  10k  [0603]  81.37,12.86 270 top
R8  10k  [0603]  79.37,12.86 90 top
R9  100k  [0603]  102.37,22.86 0 top
R10  1k  [0603]  98.37,25.86 90 top
R11  390k  [0603]  24.86,35.36 90 top
R12  10k  [0603]  30.86,35.36 270 top
R13  10k  [0603]  28.86,35.36 90 top
R14  100k  [0603]  51.86,45.36 0 top
R15  1k  [0603]  47.86,48.36 90 top
R16  390k  [0603]  75.37,35.36 90 top
R17  10k  [0603]  81.37,35.36 270 top
R18  10k  [0603]  79.37,35.36 90 top
R19  100k  [0603]  102.37,45.36 0 top
R20  1k  [0603]  98.37,48.36 90 top
R21  390k  [0603]  24.86,57.87 90 top
R22  10k  [0603]  30.86,57.87 270 top
R23  10k  [0603]  28.86,57.87 90 top
R24  100k  [0603]  51.86,67.87 0 top
R25  1k  [0603]  47.86,70.87 90 top
R26  390k  [0603]  75.37,57.87 90 top
R27  10k  [0603]  81.37,57.87 270 top
R28  10k  [0603]  79.37,57.87 90 top
R29  100k  [0603]  102.37,67.87 0 top
R30  1k  [0603]  98.37,70.87 90 top
R31  390k  [0603]  24.86,80.38 90 top
R32  10k  [0603]  30.86,80.38 270 top
R33  10k  [0603]  28.86,80.38 90 top
R34  100k  [0603]  51.86,90.38 0 top
R35  1k  [0603]  47.86,93.38 90 top
R36  390k  [0603]  75.37,80.38 90 top
R37  10k  [0603]  81.37,80.38 270 top
R38  10k  [0603]  79.37,80.38 90 top
R39  100k  [0603]  102.37,90.38 0 top
R40  1k  [0603]  98.37,93.38 90 top
R41  390k  [0603]  24.86,102.89 90 top
R42  10k  [0603]  30.86,102.89 270 top
R43  10k  [0603]  28.86,102.89 90 top
R44  100k  [0603]  51.86,112.89 0 top
R45  1k  [0603]  47.86,115.89 90 top
R46  390k  [0603]  75.37,102.89 90 top
R47  10k  [0603]  81.37,102.89 270 top
R48  10k  [0603]  79.37,102.89 90 top
R49  100k  [0603]  102.37,112.89 0 top
R50  1k  [0603]  98.37,115.89 90 top
R51  390k  [0603]  24.86,125.4 90 top
R52  10k  [0603]  30.86,125.4 270 top
R53  10k  [0603]  28.86,125.4 90 top
R54  100k  [0603]  51.86,135.4 0 top
R55  1k  [0603]  47.86,138.4 90 top
R56  390k  [0603]  75.37,125.4 90 top
R57  10k  [0603]  81.37,125.4 270 top
R58  10k  [0603]  79.37,125.4 90 top
R59  100k  [0603]  102.37,135.4 0 top
R60  1k  [0603]  98.37,138.4 90 top
R61  390k  [0603]  24.86,147.91 90 top
R62  10k  [0603]  30.86,147.91 270 top
R63  10k  [0603]  28.86,147.91 90 top
R64  100k  [0603]  51.86,157.91 0 top
R65  1k  [0603]  47.86,160.91 90 top
R66  390k  [0603]  75.37,147.91 90 top
R67  10k  [0603]  81.37,147.91 270 top
R68  10k  [0603]  79.37,147.91 90 top
R69  100k  [0603]  102.37,157.91 0 top
R70  1k  [0603]  98.37,160.91 90 top
R71  390k  [0603]  24.86,170.41 90 top
R72  10k  [0603]  30.86,170.41 270 top
R73  10k  [0603]  28.86,170.41 90 top
R74  100k  [0603]  51.86,180.41 0 top
R75  1k  [0603]  47.86,183.41 90 top
R76  390k  [0603]  75.37,170.41 90 top
R77  10k  [0603]  81.37,170.41 270 top
R78  10k  [0603]  79.37,170.41 90 top
R79  100k  [0603]  102.37,180.41 0 top
R80  1k  [0603]  98.37,183.41 90 top
S1  MOMENTARY-SWITCH-SPST-SMD-5.2MM-TALL  [TACTILE_SWITCH_SMD_5.2MM]  13.86,25.86 180 top
S2  MOMENTARY-SWITCH-SPST-SMD-5.2MM-TALL  [TACTILE_SWITCH_SMD_5.2MM]  64.37,25.86 180 top
S3  MOMENTARY-SWITCH-SPST-SMD-5.2MM-TALL  [TACTILE_SWITCH_SMD_5.2MM]  13.86,48.36 180 top
S4  MOMENTARY-SWITCH-SPST-SMD-5.2MM-TALL  [TACTILE_SWITCH_SMD_5.2MM]  64.37,48.36 180 top
S5  MOMENTARY-SWITCH-SPST-SMD-5.2MM-TALL  [TACTILE_SWITCH_SMD_5.2MM]  13.86,70.87 180 top
S6  MOMENTARY-SWITCH-SPST-SMD-5.2MM-TALL  [TACTILE_SWITCH_SMD_5.2MM]  64.37,70.87 180 top
S7  MOMENTARY-SWITCH-SPST-SMD-5.2MM-TALL  [TACTILE_SWITCH_SMD_5.2MM]  13.86,93.38 180 top
S8  MOMENTARY-SWITCH-SPST-SMD-5.2MM-TALL  [TACTILE_SWITCH_SMD_5.2MM]  64.37,93.38 180 top
S9  MOMENTARY-SWITCH-SPST-SMD-5.2MM-TALL  [TACTILE_SWITCH_SMD_5.2MM]  13.86,115.89 180 top
S10  MOMENTARY-SWITCH-SPST-SMD-5.2MM-TALL  [TACTILE_SWITCH_SMD_5.2MM]  64.37,115.89 180 top
S11  MOMENTARY-SWITCH-SPST-SMD-5.2MM-TALL  [TACTILE_SWITCH_SMD_5.2MM]  13.86,138.4 180 top
S12  MOMENTARY-SWITCH-SPST-SMD-5.2MM-TALL  [TACTILE_SWITCH_SMD_5.2MM]  64.37,138.4 180 top
S13  MOMENTARY-SWITCH-SPST-SMD-5.2MM-TALL  [TACTILE_SWITCH_SMD_5.2MM]  13.86,160.91 180 top
S14  MOMENTARY-SWITCH-SPST-SMD-5.2MM-TALL  [TACTILE_SWITCH_SMD_5.2MM]  64.37,160.91 180 top
S15  MOMENTARY-SWITCH-SPST-SMD-5.2MM-TALL  [TACTILE_SWITCH_SMD_5.2MM]  13.86,183.41 180 top
S16  MOMENTARY-SWITCH-SPST-SMD-5.2MM-TALL  [TACTILE_SWITCH_SMD_5.2MM]  64.37,183.41 180 top
U1  LIS2DH12  [LGA-12-LISDH12]  64.37,19.86 0 top
U2  LIS2DH12  [LGA-12-LISDH12]  13.86,42.36 0 top
U3  LIS2DH12  [LGA-12-LISDH12]  64.37,42.36 0 top
U4  LIS2DH12  [LGA-12-LISDH12]  13.86,64.87 0 top
U5  LIS2DH12  [LGA-12-LISDH12]  64.37,64.87 0 top
U6  LIS2DH12  [LGA-12-LISDH12]  13.86,87.38 0 top
U7  LIS2DH12  [LGA-12-LISDH12]  64.37,87.38 0 top
U8  LIS2DH12  [LGA-12-LISDH12]  13.86,109.89 0 top
U9  LIS2DH12  [LGA-12-LISDH12]  64.37,109.89 0 top
U10  LIS2DH12  [LGA-12-LISDH12]  13.86,132.4 0 top
U11  LIS2DH12  [LGA-12-LISDH12]  64.37,132.4 0 top
U12  LIS2DH12  [LGA-12-LISDH12]  13.86,154.91 0 top
U13  LIS2DH12  [LGA-12-LISDH12]  13.86,19.86 0 top
U14  LIS2DH12  [LGA-12-LISDH12]  64.37,154.91 0 top
U15  LIS2DH12  [LGA-12-LISDH12]  13.86,177.41 0 top
U16  LIS2DH12  [LGA-12-LISDH12]  64.37,177.41 0 top
U$1  [SD#DIS0]  40.86,23.16 0 top
U$2  [OVERLAY0]  31.86,15.36 0 top
U$3  [DISPLAY0]  33.16,7.86 0 top
U$4  [SD1]  28.86,7.86 0 top
U$5  [RTK5#SVG0]  23.86,22.86 0 top
U$6  [DISPLAY0]  83.67,7.86 0 top
U$7  [#ADR#0]  27.86,9.86 0 top
U$8  [CHARGE0]  51.86,23.86 0 bottom
U$9  [POWER0]  13.86,22.46 0 top
U$10  [X0]  13.76,14.86 180 top
U$11  [Y1]  16.36,17.56 0 top
U$12  [Z2]  12.26,17.46 180 top
U$13  [RTK_FACET0]  32.86,21.36 0 top
U$14  [SD1]  79.37,7.86 0 top
U$15  [#ADR#0]  78.37,9.86 0 top
U$16  [SD#DIS0]  91.37,23.16 0 top
U$17  [CHARGE0]  102.37,23.86 0 bottom
U$18  [OVERLAY0]  82.37,15.36 0 top
U$19  [POWER0]  64.37,22.46 0 top
U$20  [X0]  64.27,14.86 180 top
U$21  [Y1]  66.87,17.56 0 top
U$22  [Z2]  62.77,17.46 180 top
U$23  [RTK_FACET0]  83.37,21.36 0 top
U$24  [RTK5#SVG0]  74.37,22.86 0 top
U$25  [DISPLAY0]  33.16,30.36 0 top
U$26  [SD1]  28.86,30.36 0 top
U$27  [#ADR#0]  27.86,32.36 0 top
U$28  [SD#DIS0]  40.86,45.66 0 top
U$29  [CHARGE0]  51.86,46.36 0 bottom
U$30  [OVERLAY0]  31.86,37.86 0 top
U$31  [POWER0]  13.86,44.96 0 top
U$32  [X0]  13.76,37.36 180 top
U$33  [Y1]  16.36,40.06 0 top
U$34  [Z2]  12.26,39.96 180 top
U$35  [RTK_FACET0]  32.86,43.86 0 top
U$36  [RTK5#SVG0]  23.86,45.36 0 top
U$37  [DISPLAY0]  83.67,30.36 0 top
U$38  [SD1]  79.37,30.36 0 top
U$39  [#ADR#0]  78.37,32.36 0 top
U$40  [SD#DIS0]  91.37,45.66 0 top
U$41  [CHARGE0]  102.37,46.36 0 bottom
U$42  [OVERLAY0]  82.37,37.86 0 top
U$43  [POWER0]  64.37,44.96 0 top
U$44  [X0]  64.27,37.36 180 top
U$45  [Y1]  66.87,40.06 0 top
U$46  [Z2]  62.77,39.96 180 top
U$47  [RTK_FACET0]  83.37,43.86 0 top
U$48  [RTK5#SVG0]  74.37,45.36 0 top
U$49  [DISPLAY0]  33.16,52.87 0 top
U$50  [SD1]  28.86,52.87 0 top
U$51  [#ADR#0]  27.86,54.87 0 top
U$52  [SD#DIS0]  40.86,68.17 0 top
U$53  [CHARGE0]  51.86,68.87 0 bottom
U$54  [OVERLAY0]  31.86,60.37 0 top
U$55  [POWER0]  13.86,67.47 0 top
U$56  [X0]  13.76,59.87 180 top
U$57  [Y1]  16.36,62.57 0 top
U$58  [Z2]  12.26,62.47 180 top
U$59  [RTK_FACET0]  32.86,66.37 0 top
U$60  [RTK5#SVG0]  23.86,67.87 0 top
U$61  [DISPLAY0]  83.67,52.87 0 top
U$62  [SD1]  79.37,52.87 0 top
U$63  [#ADR#0]  78.37,54.87 0 top
U$64  [SD#DIS0]  91.37,68.17 0 top
U$65  [CHARGE0]  102.37,68.87 0 bottom
U$66  [OVERLAY0]  82.37,60.37 0 top
U$67  [POWER0]  64.37,67.47 0 top
U$68  [X0]  64.27,59.87 180 top
U$69  [Y1]  66.87,62.57 0 top
U$70  [Z2]  62.77,62.47 180 top
U$71  [RTK_FACET0]  83.37,66.37 0 top
U$72  [RTK5#SVG0]  74.37,67.87 0 top
U$73  [DISPLAY0]  33.16,75.38 0 top
U$74  [SD1]  28.86,75.38 0 top
U$75  [#ADR#0]  27.86,77.38 0 top
U$76  [SD#DIS0]  40.86,90.68 0 top
U$77  [CHARGE0]  51.86,91.38 0 bottom
U$78  [OVERLAY0]  31.86,82.88 0 top
U$79  [POWER0]  13.86,89.98 0 top
U$80  [X0]  13.76,82.38 180 top
U$81  [Y1]  16.36,85.08 0 top
U$82  [Z2]  12.26,84.98 180 top
U$83  [RTK_FACET0]  32.86,88.88 0 top
U$84  [RTK5#SVG0]  23.86,90.38 0 top
U$85  [DISPLAY0]  83.67,75.38 0 top
U$86  [SD1]  79.37,75.38 0 top
U$87  [#ADR#0]  78.37,77.38 0 top
U$88  [SD#DIS0]  91.37,90.68 0 top
U$89  [CHARGE0]  102.37,91.38 0 bottom
U$90  [OVERLAY0]  82.37,82.88 0 top
U$91  [POWER0]  64.37,89.98 0 top
U$92  [X0]  64.27,82.38 180 top
U$93  [Y1]  66.87,85.08 0 top
U$94  [Z2]  62.77,84.98 180 top
U$95  [RTK_FACET0]  83.37,88.88 0 top
U$96  [RTK5#SVG0]  74.37,90.38 0 top
U$97  [DISPLAY0]  33.16,97.89 0 top
U$98  [SD1]  28.86,97.89 0 top
U$99  [#ADR#0]  27.86,99.89 0 top
U$100  [SD#DIS0]  40.86,113.19 0 top
U$101  [CHARGE0]  51.86,113.89 0 bottom
U$102  [OVERLAY0]  31.86,105.39 0 top
U$103  [POWER0]  13.86,112.49 0 top
U$104  [X0]  13.76,104.89 180 top
U$105  [Y1]  16.36,107.59 0 top
U$106  [Z2]  12.26,107.49 180 top
U$107  [RTK_FACET0]  32.86,111.39 0 top
U$108  [RTK5#SVG0]  23.86,112.89 0 top
U$109  [DISPLAY0]  83.67,97.89 0 top
U$110  [SD1]  79.37,97.89 0 top
U$111  [#ADR#0]  78.37,99.89 0 top
U$112  [SD#DIS0]  91.37,113.19 0 top
U$113  [CHARGE0]  102.37,113.89 0 bottom
U$114  [OVERLAY0]  82.37,105.39 0 top
U$115  [POWER0]  64.37,112.49 0 top
U$116  [X0]  64.27,104.89 180 top
U$117  [Y1]  66.87,107.59 0 top
U$118  [Z2]  62.77,107.49 180 top
U$119  [RTK_FACET0]  83.37,111.39 0 top
U$120  [RTK5#SVG0]  74.37,112.89 0 top
U$121  [DISPLAY0]  33.16,120.4 0 top
U$122  [SD1]  28.86,120.4 0 top
U$123  [#ADR#0]  27.86,122.4 0 top
U$124  [SD#DIS0]  40.86,135.7 0 top
U$125  [CHARGE0]  51.86,136.4 0 bottom
U$126  [OVERLAY0]  31.86,127.9 0 top
U$127  [POWER0]  13.86,135 0 top
U$128  [X0]  13.76,127.4 180 top
U$129  [Y1]  16.36,130.1 0 top
U$130  [Z2]  12.26,130 180 top
U$131  [RTK_FACET0]  32.86,133.9 0 top
U$132  [RTK5#SVG0]  23.86,135.4 0 top
U$133  [DISPLAY0]  83.67,120.4 0 top
U$134  [SD1]  79.37,120.4 0 top
U$135  [#ADR#0]  78.37,122.4 0 top
U$136  [SD#DIS0]  91.37,135.7 0 top
U$137  [CHARGE0]  102.37,136.4 0 bottom
U$138  [OVERLAY0]  82.37,127.9 0 top
U$139  [POWER0]  64.37,135 0 top
U$140  [X0]  64.27,127.4 180 top
U$141  [Y1]  66.87,130.1 0 top
U$142  [Z2]  62.77,130 180 top
U$143  [RTK_FACET0]  83.37,133.9 0 top
U$144  [RTK5#SVG0]  74.37,135.4 0 top
U$145  [DISPLAY0]  33.16,142.91 0 top
U$146  [SD1]  28.86,142.91 0 top
U$147  [#ADR#0]  27.86,144.91 0 top
U$148  [SD#DIS0]  40.86,158.21 0 top
U$149  [CHARGE0]  51.86,158.91 0 bottom
U$150  [OVERLAY0]  31.86,150.41 0 top
U$151  [POWER0]  13.86,157.51 0 top
U$152  [X0]  13.76,149.91 180 top
U$153  [Y1]  16.36,152.61 0 top
U$154  [Z2]  12.26,152.51 180 top
U$155  [RTK_FACET0]  32.86,156.41 0 top
U$156  [RTK5#SVG0]  23.86,157.91 0 top
U$157  [DISPLAY0]  83.67,142.91 0 top
U$158  [SD1]  79.37,142.91 0 top
U$159  [#ADR#0]  78.37,144.91 0 top
U$160  [SD#DIS0]  91.37,158.21 0 top
U$161  [CHARGE0]  102.37,158.91 0 bottom
U$162  [OVERLAY0]  82.37,150.41 0 top
U$163  [POWER0]  64.37,157.51 0 top
U$164  [X0]  64.27,149.91 180 top
U$165  [Y1]  66.87,152.61 0 top
U$166  [Z2]  62.77,152.51 180 top
U$167  [RTK_FACET0]  83.37,156.41 0 top
U$168  [RTK5#SVG0]  74.37,157.91 0 top
U$169  [DISPLAY0]  33.16,165.41 0 top
U$170  [SD1]  28.86,165.41 0 top
U$171  [#ADR#0]  27.86,167.41 0 top
U$172  [SD#DIS0]  40.86,180.71 0 top
U$173  [CHARGE0]  51.86,181.41 0 bottom
U$174  [OVERLAY0]  31.86,172.91 0 top
U$175  [POWER0]  13.86,180.01 0 top
U$176  [X0]  13.76,172.41 180 top
U$177  [Y1]  16.36,175.11 0 top
U$178  [Z2]  12.26,175.01 180 top
U$179  [RTK_FACET0]  32.86,178.91 0 top
U$180  [RTK5#SVG0]  23.86,180.41 0 top
U$181  [DISPLAY0]  83.67,165.41 0 top
U$182  [SD1]  79.37,165.41 0 top
U$183  [#ADR#0]  78.37,167.41 0 top
U$184  [SD#DIS0]  91.37,180.71 0 top
U$185  [CHARGE0]  102.37,181.41 0 bottom
U$186  [OVERLAY0]  82.37,172.91 0 top
U$187  [POWER0]  64.37,180.01 0 top
U$188  [X0]  64.27,172.41 180 top
U$189  [Y1]  66.87,175.11 0 top
U$190  [Z2]  62.77,175.01 180 top
U$191  [RTK_FACET0]  83.37,178.91 0 top
U$192  [RTK5#SVG0]  74.37,180.41 0 top

## Library data of the parts
C1 C9 C20 C31 C41 C51 C61 C71 C81 C91 C101 C111 C121 C131 C141 C151 = SparkFun-Capacitors; PROD_ID: CAP-11624
C2 C3 C10 C11 C21 C22 C32 C33 C42 C43 C52 C53 C62 C63 C72 C73 C82 C83 C92 C93 C102 C103 C112 C113 C122 C123 C132 C133 C142 C143 C152 C153 = SparkFun-Capacitors; PROD_ID: CAP-08064
C4 C6 C7 C12 C14 C15 C23 C25 C26 C34 C36 C37 C44 C46 C47 C54 C56 C57 C64 C66 C67 C74 C76 C77 C84 C86 C87 C94 C96 C97 C104 C106 C107 C114 C116 C117 C124 C126 C127 C134 C136 C137 C144 C146 C147 C154 C156 C157 = SparkFun-Capacitors; PROD_ID: CAP-00868
C5 C13 C24 C35 C45 C55 C65 C75 C85 C95 C105 C115 C125 C135 C145 C155 = SparkFun-Capacitors; PROD_ID: CAP-10300
C8 C19 C30 C40 C50 C60 C70 C80 C90 C100 C110 C120 C130 C140 C150 C160 = SparkFun-Capacitors; PROD_ID: CAP-11015
C16-C18 C27-C29 C38 C39 C48 C49 C58 C59 C68 C69 C78 C79 C88 C89 C98 C99 C108 C109 C118 C119 C128 C129 C138 C139 C148 C149 C158 C159 = SparkFun-Capacitors; PROD_ID: CAP-00810
D1-D16 = SparkFun-LED; PROD_ID: DIO-11076
E$1-E$4 FID1-FID64 LOGO1-LOGO32 = SparkFun-Aesthetics
E$5 E$6 = SparkFun-Retired
J1 J3-J5 J7 J8 J10 J11 J13 J14 J16 J17 J19 J20 J22 J23 J25 J26 J28 J29 J31 J32 J34 J35 J37 J38 J40 J41 J43 J44 J46 J47 = RTK Facet; PROD_ID: CONN-15766
J2 J6 J9 J12 J15 J18 J21 J24 J27 J30 J33 J36 J39 J42 J45 J48 = SparkFun-Connectors; PROD_ID: CONN-16110
JP1-JP16 = SparkFun-Jumpers
OLED1-OLED16 = SparkFun-Displays; PROD_ID: LCD-12019
R1 R6 R11 R16 R21 R26 R31 R36 R41 R46 R51 R56 R61 R66 R71 R76 = SparkFun-Resistors; PROD_ID: RES-12024
R2 R3 R7 R8 R12 R13 R17 R18 R22 R23 R27 R28 R32 R33 R37 R38 R42 R43 R47 R48 R52 R53 R57 R58 R62 R63 R67 R68 R72 R73 R77 R78 = SparkFun-Resistors; PROD_ID: RES-00824
R4 R9 R14 R19 R24 R29 R34 R39 R44 R49 R54 R59 R64 R69 R74 R79 = SparkFun-Resistors; PROD_ID: RES-07828
R5 R10 R15 R20 R25 R30 R35 R40 R45 R50 R55 R60 R65 R70 R75 R80 = SparkFun-Resistors; PROD_ID: RES-07856
S1-S16 = SparkFun-Switches; PROD_ID: SWCH-14139
U1-U16 = SparkFun-Sensors; DIGIKEY: 497-14851-2-ND; PROD_ID: IC-14229
U$1-U$192 = output